# Altium PCB SignalGen_V5_Single_Channel.PcbDoc
Units mm, origin at the board's own origin, x right, y up, seen from the top; angles counter-clockwise.
Board outline 80 x 60 mm, 2 copper layers (Top Layer, Bottom Layer); 43 components, 21 nets, 115 pads, 0 vias.
Unrouted connection lines stored in the file: 44.
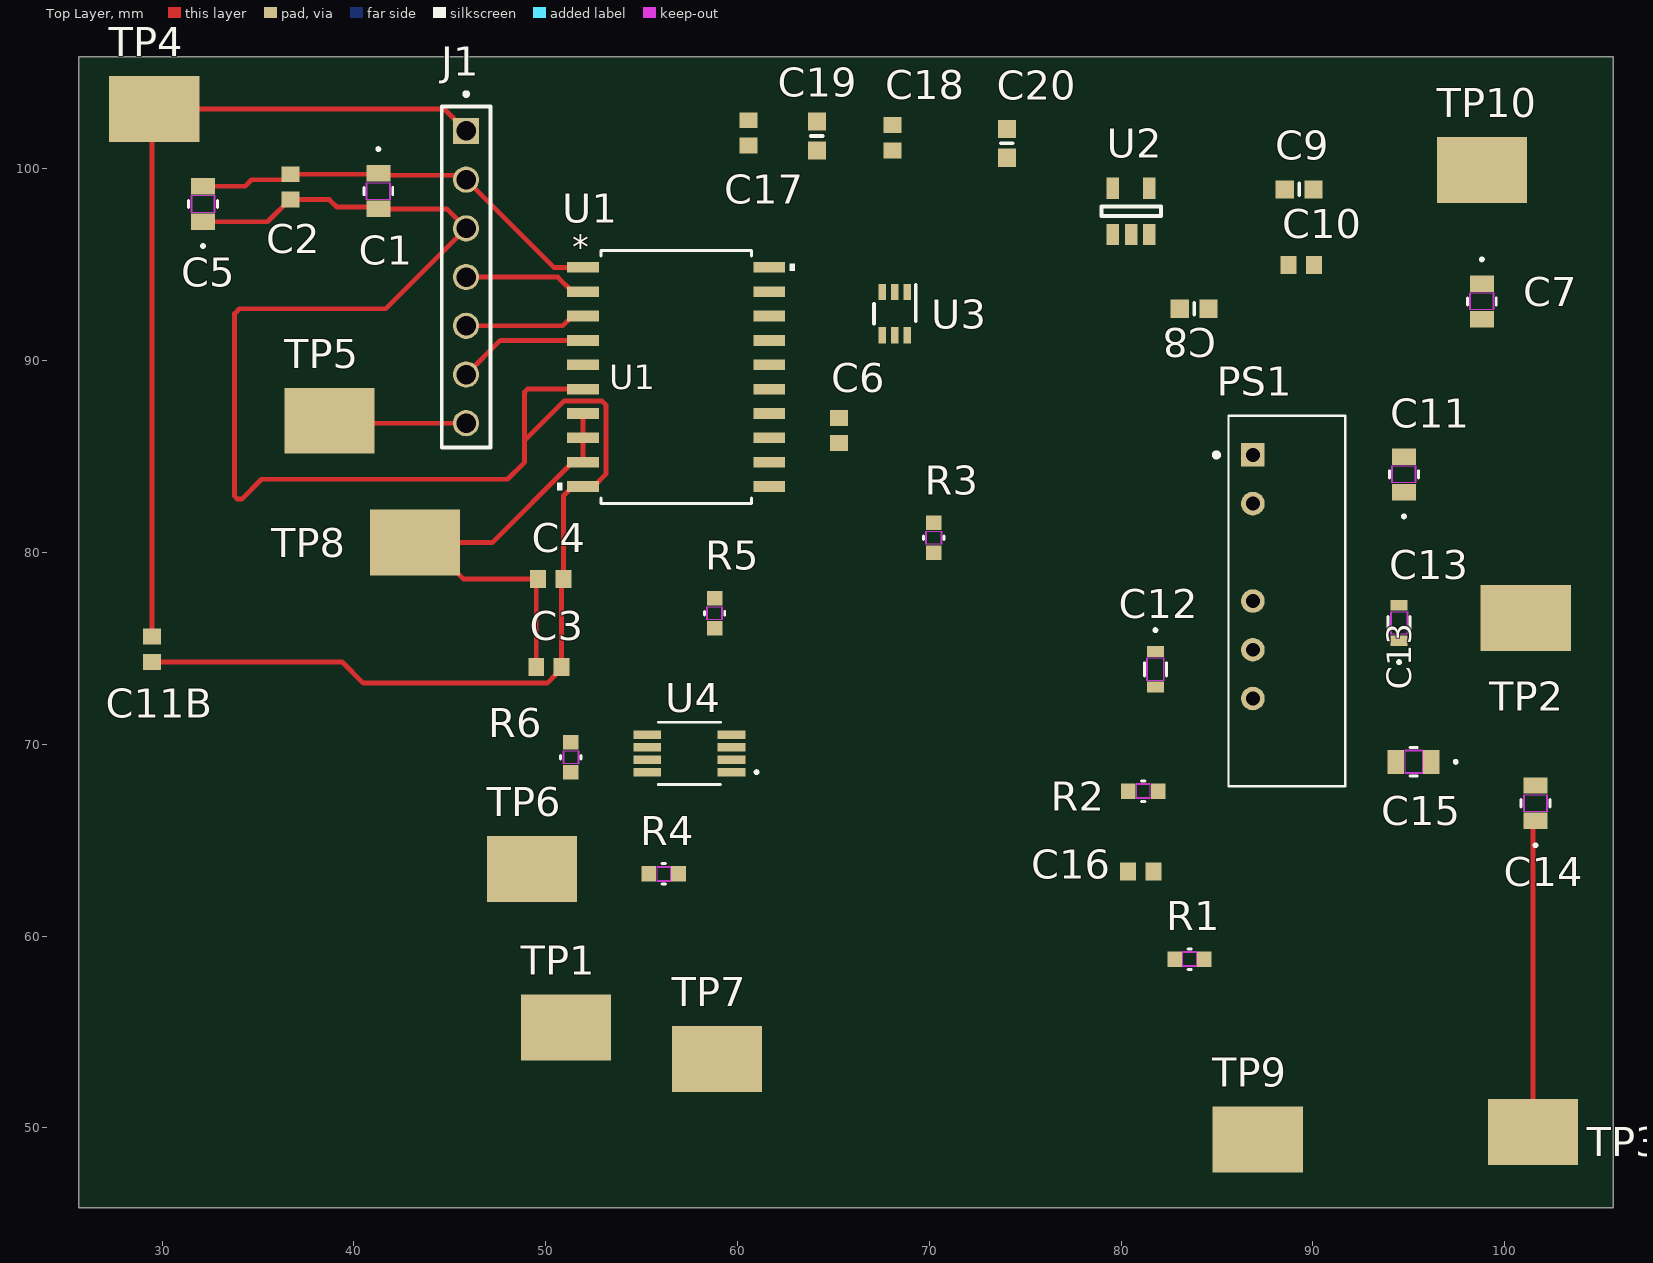
[diagram p0: Top Layer view]
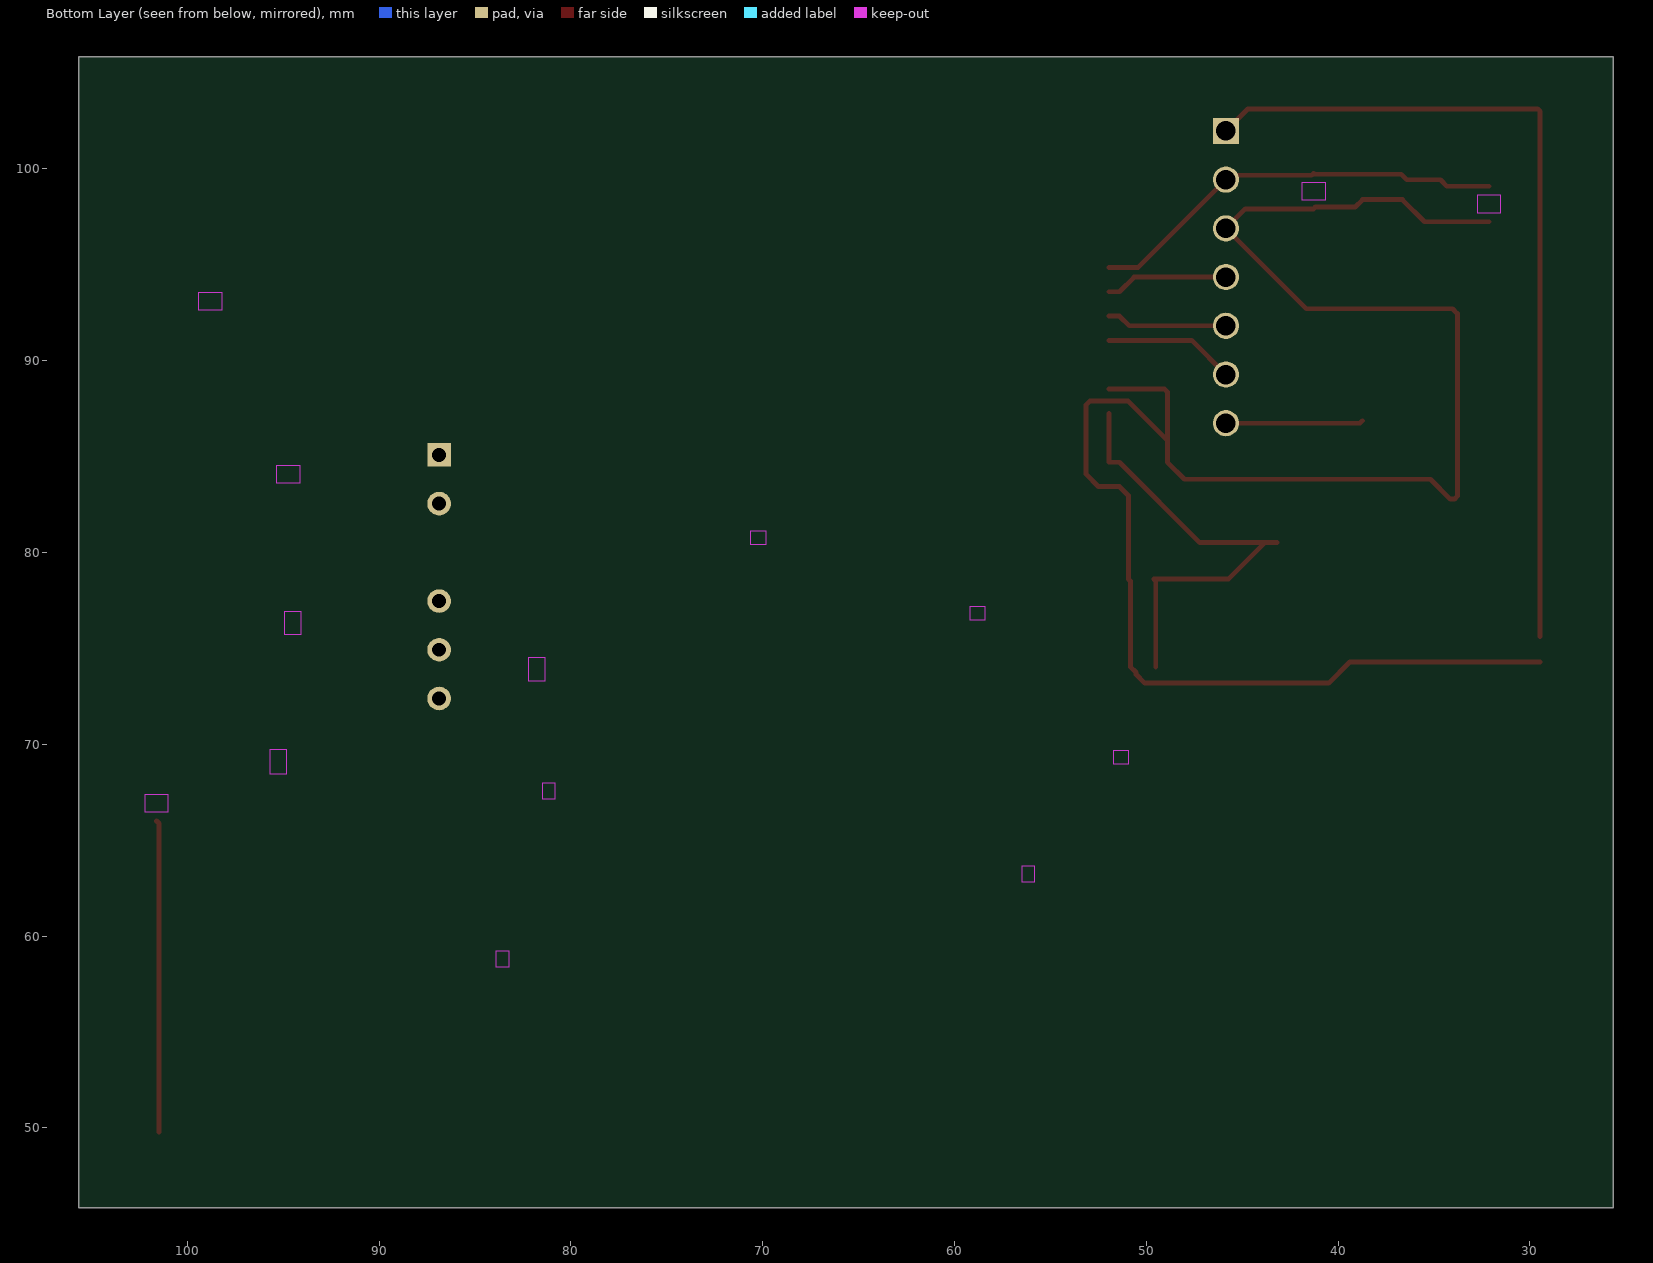
[diagram p1: Bottom Layer view, seen from below]

## Layer stack, top to bottom
Top Solder: solder mask 0.0102, Solder Resist, Dk 3.5
Top Layer: signal copper 0.0356
Dielectric 1: dielectric 0.32, FR-4, Dk 4.8
Bottom Layer: signal copper 0.0356
Bottom Solder: solder mask 0.0102, Solder Resist, Dk 3.5

## Board outline
25.654,45.847 25.654,105.847 105.654,105.847 105.654,45.847

## Design rules (kind name [scope] priority, off if disabled: settings)
Clearance [All] p1: gap=0.254 ignorepadtopadclearanceinfootprint=FALSE
PolygonConnect [All] p1: connectstyle=Relief reliefconductorwidth=0.254 reliefentries=4 polygonreliefangle="90 Angle" airgapwidth=0.254
RoutingVias [All] p1: holewidth=0.711 width=1.27 viastyle="Through Hole" minholewidth=0.711 minwidth=1.27 maxholewidth=0.711 maxwidth=1.27
SolderMaskExpansion [All] p1: expansion=0.102 istentingtop=FALSE
Width [All] p1: maxlimit=0.254 minlimit=0.254 preferedwidth=0.254
30 further rules are at their usual default settings.

## Components (designator, comment, footprint, x,y, rotation, side; value= is the part's Value field where it differs from the comment)
C1 "10uF" G-21_MUR 41.275,98.841 r270 top
C2 "100nF" CAPC1608X90N 36.703,99.06 r270 top
C3 "100nF SYS" CAPC1608X90N 50.165,74.041 r180 top
C4 "100nF VIO" CAPC1608X90N 50.267,78.613 r0 top
C5 "10 uF SYS" G-21_MUR 32.131,98.171 r90 top
C6 "100nF ISO" CAPC1608X90N 65.278,86.36 r90 top
C7 "10uF ISO" G-21_MUR 98.806,93.091 r270 top
C8 "1uF" INDC1608X90N 83.808,92.71 r0 top
C9 "1uF" INDC1608X90N 89.281,98.933 r180 top
C10 "100nF" CAPC1608X90N 89.383,94.996 r180 top
C11 "10uF" G-21_MUR 94.742,84.074 r90 top
C11B "100nF" CAPC1608X90N 29.464,74.955 r90 top
C12 "470nF" CAP_1608_TDK 81.788,73.914 r270 top
C13 "470nF" CAP_1608_TDK 94.488,76.327 r90 top
C14 "10uF" G-21_MUR 101.6,66.929 r90 top
C15 "10uF" G-21_MUR 95.25,69.088 r180 top
C16 "100nF" CAPC1608X90N 81.026,63.373 r0 top
C17 "100nF" CAPC1608X90N 60.579,101.879 r90 top
C18 "100nF" CAPC1608X90N 68.072,101.625 r270 top
C19 "1uF" INDC1608X90N 64.135,101.715 r90 top
C20 "1uF" INDC1608X90N 74.041,101.334 r270 top
J1 "SS-107-T-1A" SAMTEC_SS-107-T-1A 45.847,101.981 r90 top
PS1 "IA0305S" XP_IA0305S 86.868,85.09 r270 top
R1 "10K" RC0603N_YAG 83.566,58.801 r180 top
R2 "10K" RC0603N_YAG 81.153,67.564 r0 top
R3 "10K" RC0603N_YAG 70.231,80.772 r90 top
R4 "10K" RC0603N_YAG 56.147,63.246 r180 top
R5 "20K" RC0603N_YAG 58.801,76.835 r90 top
R6 "20K" RC0603N_YAG 51.308,69.329 r90 top
TP1 "+ISO_P5V" KEYSTONE_5016 51.054,55.245 r0 top
TP2 "-ISO_N5V" KEYSTONE_5016 101.092,76.581 r0 top
TP3 "ISO_GND_ISOW" KEYSTONE_5016 101.473,49.784 r0 top
TP4 "VBUS_5V" KEYSTONE_5016 29.591,103.124 r0 top
TP5 "Fault_TP" KEYSTONE_5016 38.735,86.868 r0 top
TP6 "Bi_PolarOut" KEYSTONE_5016 49.276,63.5 r0 top
TP7 "VREF_MID_TP" KEYSTONE_5016 58.928,53.594 r0 top
TP8 "TP_SYS_3V3" KEYSTONE_5016 43.18,80.518 r0 top
TP9 "TP_ISO_3V3_RAW" KEYSTONE_5016 87.122,49.403 r0 top
TP10 "TP_ISO_3V3_CLEAN" KEYSTONE_5016 98.806,99.949 r0 top
U1 "ISOW7741DFM" SOIC20_DFM_TEX 56.794,89.154 r0 top
U2 "TLV70233DBVT" DBV0005A_N 80.518,97.79 r90 top
U3 "DAC8411IDCKT" DCK0006A_N 68.199,92.456 r270 top
U4 "OPA2192IDGKR" DGK0008A_N_TEX 57.49,69.525 r180 top

## Footprints (in the part's own frame and the unit in brackets; to place one, negate y for a bottom-side part, rotate by r counter-clockwise, add the part's x,y. Pads: shape width x height; smd on the part's side, far side on the other; paste and mask are expansions set on the pad)
CAP_1608_TDK [mil]
  rect 21.78x35 smd paste+0 mask+0: 1(-36.39,0) 2(36.39,0)
  Top Layer keep-out region: -23.5,-15.5 -23.5,15.5 23.5,15.5 23.5,-15.5
  Keep-Out Layer region: -23.5,-17.5 -23.5,17.5 23.5,17.5 23.5,-17.5
  silkscreen extent -83,-23 13,23, body extent -34,-17 34,17, height 35
CAPC1608X90N [mm]
  rect 0.83x0.94 smd: 1(-0.66,0) 2(0.66,0)
DBV0005A_N [mm]
  rect 1.1x0.65 smd paste-0.102 mask+0.051: 1(-1.2,0.95) 2(-1.2,0) 3(-1.2,-0.95) 4(1.2,-0.95) 5(1.2,0.95)
  silkscreen extent -0.25,-1.55 0.25,1.55
DCK0006A_N [mm]
  rect 0.85x0.4 smd paste+0 mask+0.051: 1(-1.125,0.65) 2(-1.125,0) 3(-1.125,-0.65) 4(1.125,-0.65) 5(1.125,0) 6(1.125,0.65)
  silkscreen extent -1.5,-1.09 0.51,1.09
DGK0008A_N_TEX [mm]
  rect 1.448x0.457 smd paste+0 mask+0.051: 1(-2.2,0.975) 2(-2.2,0.325) 3(-2.2,-0.325) 4(-2.2,-0.975) 5(2.2,-0.975) 6(2.2,-0.325) 7(2.2,0.325) 8(2.2,0.975)
  silkscreen extent -3.58,-1.63 1.63,1.63, body extent -2.57,-1.5 2.57,1.5, height 1.09
G-21_MUR [mil]
  rect 33.78x49 smd paste+0 mask+0: 1(-36.39,0) 2(36.39,0)
  Top Layer keep-out region: -17.5,-22.5 -17.5,22.5 17.5,22.5 17.5,-22.5
  Keep-Out Layer region: -17.5,-24.5 -17.5,24.5 17.5,24.5 17.5,-24.5
  silkscreen extent -89,-30 7,30, body extent -39,-24 39,24, height 57
INDC1608X90N [mm]
  rect 0.95x0.95 smd: 1(-0.75,0) 2(0.75,0)
  silkscreen extent 0,-0.3 0,0.3
KEYSTONE_5016 [mm]
  rect 4.7x3.43 smd: TP(0,0)
  body extent -1.91,-1.42 1.91,1.42, height 2.29
RC0603N_YAG [mil]
  rect 30x32 smd paste+0 mask+0: 1(-30.5,0) 2(30.5,0)
  Top Layer keep-out region: -13.5,-14 -13.5,14 13.5,14 13.5,-14
  Keep-Out Layer region: -13.5,-16 -13.5,16 13.5,16 13.5,-16
  silkscreen extent -3,-21 3,21, body extent -31,-16 31,16, height 28
SAMTEC_SS-107-T-1A [mil]
  rect 53.78x53.78 hole 40: 01(0,0)
  round 53.78 hole 40: 02(-100,0) 03(-200,0) 04(-300,0) 05(-400,0) 06(-500,0) 07(-600,0)
  silkscreen extent -650,-50 80,50
SOIC20_DFM_TEX [mil]
  rect 65x22 smd paste+0 mask+0: 1(-191,225) 2(-191,175) 3(-191,125) 4(-191,75) 5(-191,25) 6(-191,-25) 7(-191,-75) 8(-191,-125) 9(-191,-175) 10(-191,-225) 11(191,-225) 12(191,-175) 13(191,-125) 14(191,-75) 15(191,-25) 16(191,25) 17(191,75) 18(191,125) 19(191,175) 20(191,225)
  silkscreen extent -244,-260 244,260, body extent -209,-254 209,254, height 140
XP_IA0305S [mm]
  rect 1.228x1.228 hole 0.72: 1(0,0)
  round 1.228 hole 0.72: 2(2.54,0) 4(7.62,0) 5(10.16,0) 6(12.7,0)
  silkscreen extent -2.03,-2.02 17.27,4.82

## Part data
C1 C5 C7 C11 C14 C15: library part GRM21BR61E106KA73L, "Description", Manufacturer_Name=Murata, Copyright="Copyright (C) 2025 Ultra Librarian. All rights reserved.", Manufacturer_Part_Number=GRM21BR61E106KA73L
C2 C3 C4 C6 C10 C11B C16 C17 C18: library part CC0603KRX7R8BB104, "Cap Ceramic 0.1uF 25V X7R 10% Pad SMD 0603 125C T/R", Manufacturer_Name=YAGEO, Mouser Part Number=603-CC603KRX7R8BB104, Datasheet Link=https://www.arrow.com/en/products/cc0603krx7r8bb104/yageo?region=nac, Geometry.Height=0.9mm, Manufacturer_Part_Number=CC0603KRX7R8BB104, Mouser Price/Stock=https://www.mouser.co.uk/ProductDetail/YAGEO/CC0603KRX7R8BB104?qs=AgBp2OyFlx%252B4QOgEm%2Fb3YQ%3D%3D
C8 C9 C19 C20: library part MBASE168SB7105KTNA18, "Taiyo Yuden CAP, MLCC, 0603, 16V, X7R, 1 uF 10 %, T&R", Manufacturer_Name="TAIYO YUDEN", Datasheet Link=https://ds.yuden.co.jp/TYCOMPAS/ut/specSheet?pn=MBASE168SB7105KTNA18, Geometry.Height=0.9mm, Manufacturer_Part_Number=MBASE168SB7105KTNA18
C12 C13: library part C1608X7R1H474K080AC, "CAPACITOR; SMT (0603); CERAMIC CHIP; 0.47UF; 50V; TOL=10%; TG=-55 DEGC TO +125 DEGC; TC=X7R; AUTO", Manufacturer_Name=TDK, Copyright="Copyright (C) 2026 Ultra Librarian. All rights reserved.", Manufacturer_Part_Number=C1608X7R1H474K080AC
J1: Package=None, Availability=Unavailable, MP=SS-107-T-1A, Price=None
PS1: "DC DC CONVERTER +/-5V 1W", Package=None, Availability=Unavailable, MP=IA0305S, Price=None
R1 R2 R3 R4: library part RC0603FR-0710KL, "RES SMD 10kO 1% 1/10W 0603", Manufacturer_Name=Yageo, Copyright="Copyright (C) 2025 Ultra Librarian. All rights reserved.", Manufacturer_Part_Number=RC0603FR-0710KL
R5 R6: library part RC0603FR-0720KL, "Description", Manufacturer_Name=Yageo, Copyright="Copyright (C) 2025 Ultra Librarian. All rights reserved.", Manufacturer_Part_Number=RC0603FR-0720KL
TP1 TP2 TP3 TP4 TP5 TP6 TP7 TP8 TP9 TP10: library part 5016, "Test Point Compact SMT Phos Bronze/Silver 1000pc Tape & Reel", Package="NON STANDARD-1 Keystone", Check_prices=https://www.snapeda.com/parts/5016/Keystone/view-part/?ref=eda, MF="Keystone Electronics", MP=5016, SnapEDA_Link=https://www.snapeda.com/parts/5016/Keystone/view-part/?ref=snap
U1: "Low-emissions, low-ripple, quad-channel, 3/1, reinforced digital isolator with integrated power 20-SOIC -40 to 125", Manufacturer_Name="Texas Instruments", Copyright="Copyright (C) 2026 Ultra Librarian. All rights reserved.", Manufacturer_Part_Number=ISOW7741DFM, RefDes=RefDes, Type=Type
U2: "300-mA, high-PSRR, low-IQ, low-dropout voltage regulator with enable 5-SOT-23 -40 to 125", Alternate_PartNumber=TLV70212DBVT, Manufacturer="Texas Instruments", PartNumber=TLV70212DBVR, CompType=IC, Copyright="Copyright (C) 2026 Ultra Librarian. All rights reserved.", Manufacturer_Name="Texas Instruments", Manufacturer_Part_Number=TLV70233DBVT, MountType=SMT, PackageReference=DBV0005A, RefDes=RefDes, RoHS=Y, Type=TYPE
U3: "16bit, Single Channel, 80uA, 2.0V-5.5V DAC in SC70 Package 6-SC70 -40 to 125", Manufacturer="Texas Instruments", PartNumber=DAC8411IDCKR, Alternate_PartNumber=DAC8411IDCKT, CompType=IC, Copyright="Copyright (C) 2025 Ultra Librarian. All rights reserved.", Manufacturer_Name="Texas Instruments", Manufacturer_Part_Number=DAC8411IDCKT, MountType=SMT, PackageReference=DCK0006A, RefDes=RefDes, RoHS=Y, Type=TYPE
U4: "36-V, Precision, RRIO, Low Offset Voltage, Low Input Bias Current Op Amp With e-trim 8-VSSOP -40 to 125", Manufacturer_Name="Texas Instruments", Copyright="Copyright (C) 2025 Ultra Librarian. All rights reserved.", Manufacturer_Part_Number=OPA2192IDGKR, RefDes=RefDes, Type=Type

## Nets (pads, with @x,y where several pads share a name; then routed paths per layer and width w, separated by ;. In a path a pad name is that pad's centre, name@x,y a point inside that pad or via, vN(x,y) a via of type N, cw(c..) or ccw(c..) an arc to the next point about the centre after c; other vN are vias at no path point)
BIPOLAR_OUT: R6.1 TP6.TP U4.7
CS_ISO: U1.17 U3.1
DAC_OUT_UNIPOLAR: R3.1 U3.6
FAULT_TO_PICO: J1.07 TP5.TP | length 7.2
  Top Layer w0.254: TP5.TP 38.862,86.741 J1.07
IN+_B: R4.2 R5.1 U4.5
IN-_B: R3.2 R6.2 U4.6
ISO_3V3_CLEAN: C9.2 C10.2 R1.1 TP9.TP U2.5 U3.4
ISO_3V3_RAW: C6.2 C7.2 C8.2 TP10.TP U1.12 U1.14 U1.20 U2.1 U2.3
ISO_GND_ISOW: C6.1 C7.1 C8.1 C9.1 C10.1 C12.1 C13.1 C14.1 C15.1 C16.2 C17.2 C18.1 C19.2 C20.1 PS1.5 R2.2 R5.2 TP3.TP U1.11 U1.13 U1.15 U2.2 U3.5 | length 16.3
  Top Layer w0.254: TP3.TP 101.473,65.878 C14.1
ISO_N5V: C13.2 C14.2 C18.2 C20.2 PS1.4 TP2.TP U4.4
ISO_P5V: C12.2 C15.2 C17.1 C19.1 PS1.6 TP1.TP U4.8
MID_RAW: C16.1 R1.2 R2.1 U4.3
MOSI_ISO: U1.18 U3.3
SCLK_ISO: U1.19 U3.2
SPI_CS_SYS: J1.06 U1.4 | length 6.8
  Top Layer w0.254: J1.06 47.625,91.059 U1.4
SPI_MOSI_SYS: J1.05 U1.3 | length 6.3
  Top Layer w0.254: J1.05 50.889,91.821 51.397,92.329 U1.3
SPI_SCLK_SYS: J1.04 U1.2 | length 6.4
  Top Layer w0.254: J1.04 50.635,94.361 51.397,93.599 U1.2
SYS_3V3: C1.1 C2.1 C3.2 C4.1 C5.2 J1.02 TP8.TP U1.1 U1.7 U1.8 U1.9 | length 46.4
  Top Layer w0.254: C5.2 34.325,99.095 34.662,99.432 36.415,99.432 C2.1 41.229,99.72 C1.1 41.374,99.667 45.32,99.667 45.546,99.441 J1.02 50.419,94.869 U1.1 ; TP8.TP TP8.TP@43.815,80.518 ; C3.2 49.505,78.511 C4.1 45.72,78.613 TP8.TP@43.815,80.518 ; U1.7 U1.8 U1.9 51.397,84.709 47.206,80.518 TP8.TP@43.815,80.518
SYS_GND: C1.2 C2.2 C3.1 C4.2 C5.1 C11.1 C11B.1 J1.03 PS1.2 U1.6 U1.10 | length 103.7
  Top Layer w0.254: C11B.1 39.39,74.295 40.495,73.19 50.078,73.19 50.537,73.649 50.537,73.753 C3.1 50.825,78.511 C4.2 50.927,82.969 51.397,83.439 U1.10 52.489,83.439 53.149,84.099 53.149,87.686 52.926,87.909 50.96,87.909 48.895,85.845 ; C5.1 35.495,97.247 36.648,98.4 C2.2 38.721,98.4 39.105,98.016 41.176,98.016 C1.2 44.831,97.917 J1.03 41.656,92.71 34.036,92.71 33.782,92.456 33.782,82.931 33.931,82.782 34.141,82.782 35.179,83.82 48.006,83.82 48.895,84.709 48.895,85.845 ; U1.6 49.044,88.519 48.895,88.37 48.895,85.845
VBUS_5V: C11.2 C11B.2 J1.01 PS1.1 TP4.TP | length 44.3
  Top Layer w0.254: C11B.2 29.464,102.997 TP4.TP 44.704,103.124 J1.01
VREF_MID: R4.1 TP7.TP U4.1 U4.2
pads on no net: U1.5 U1.16 U2.4

## Text inside footprints (layer, text, board x,y; h text height)
U1: Top Overlay "*" at 51.371,95.301 h1.27; Mechanical 13 "*" at 53.061,94.272 h1.27